# Altium PCB D3R900.PcbDoc
Units mil, origin at the board's own origin, x right, y up, seen from the top; angles counter-clockwise.
Board outline 3562.99 x 3346.46 mil, 2 copper layers (Top Layer, Bottom Layer); 68 components, 50 nets, 348 pads, 49 vias.
Unrouted connection lines stored in the file: 92.
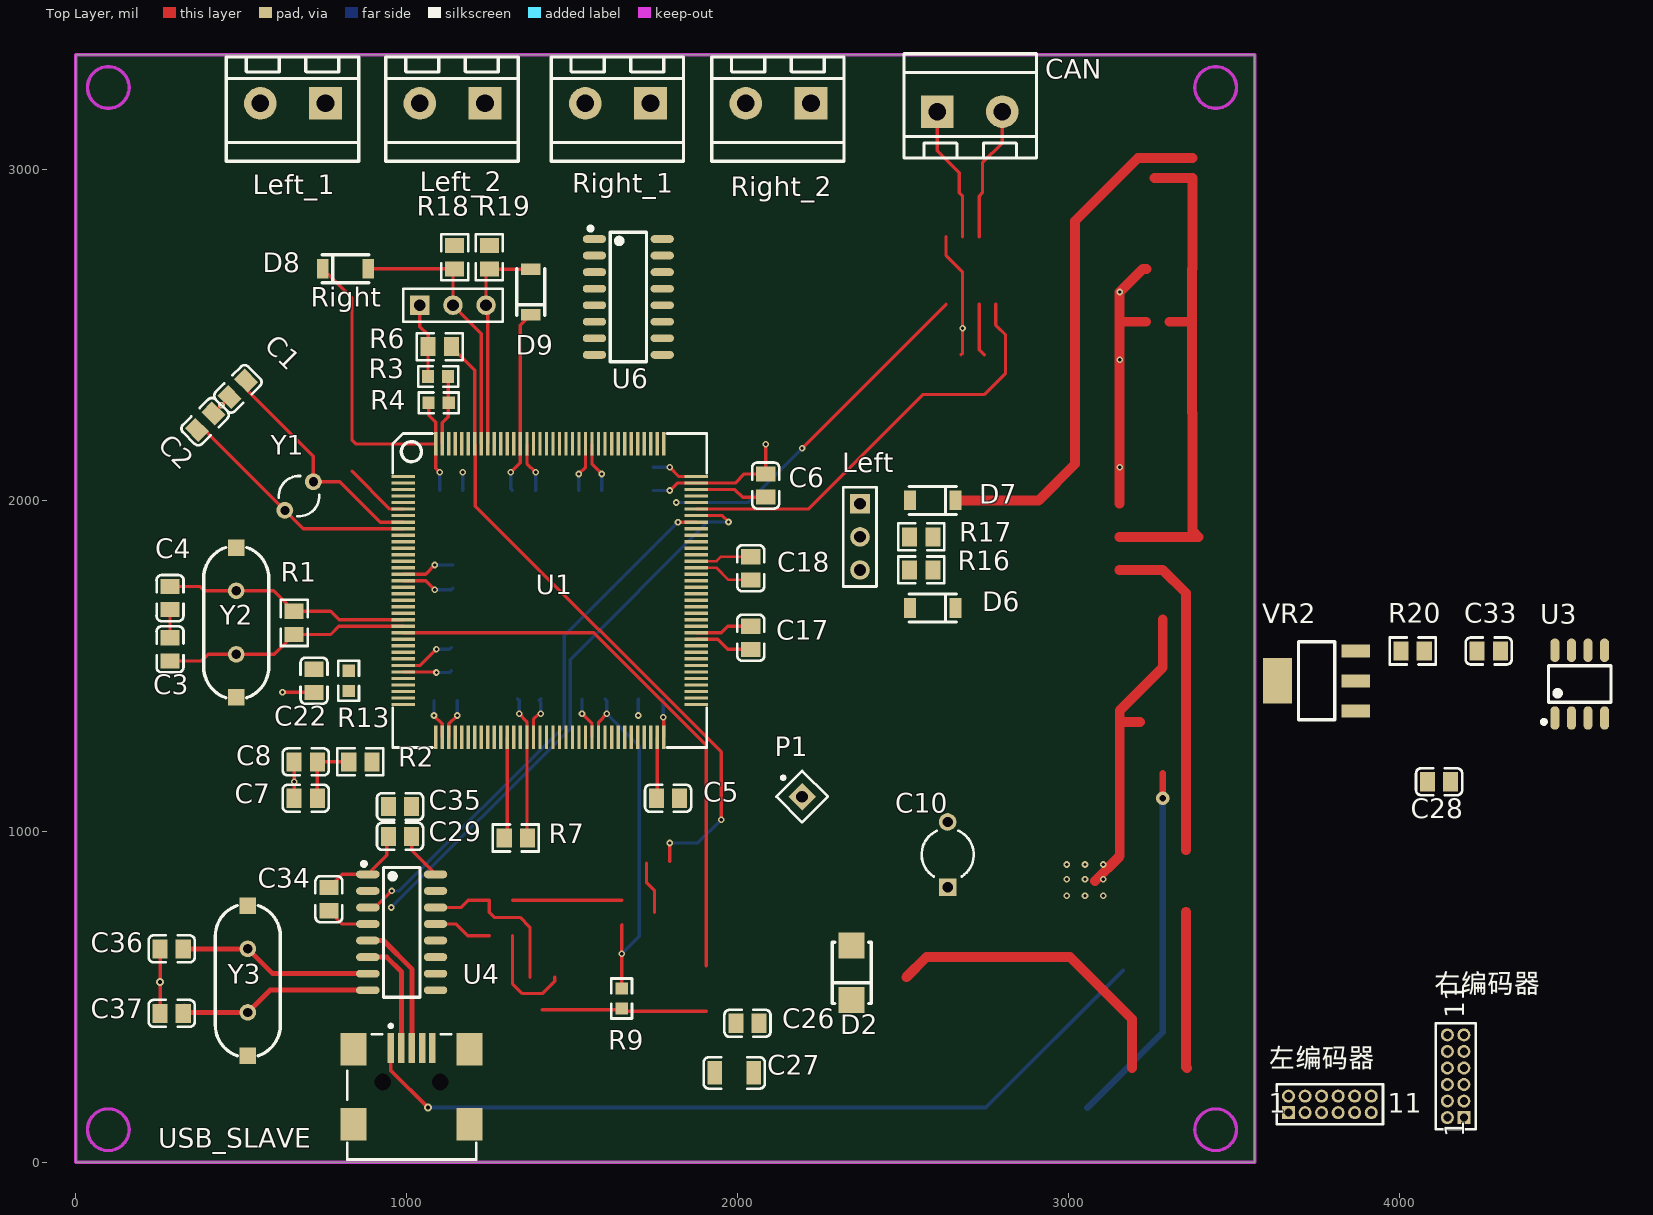
[diagram p0: Top Layer view]
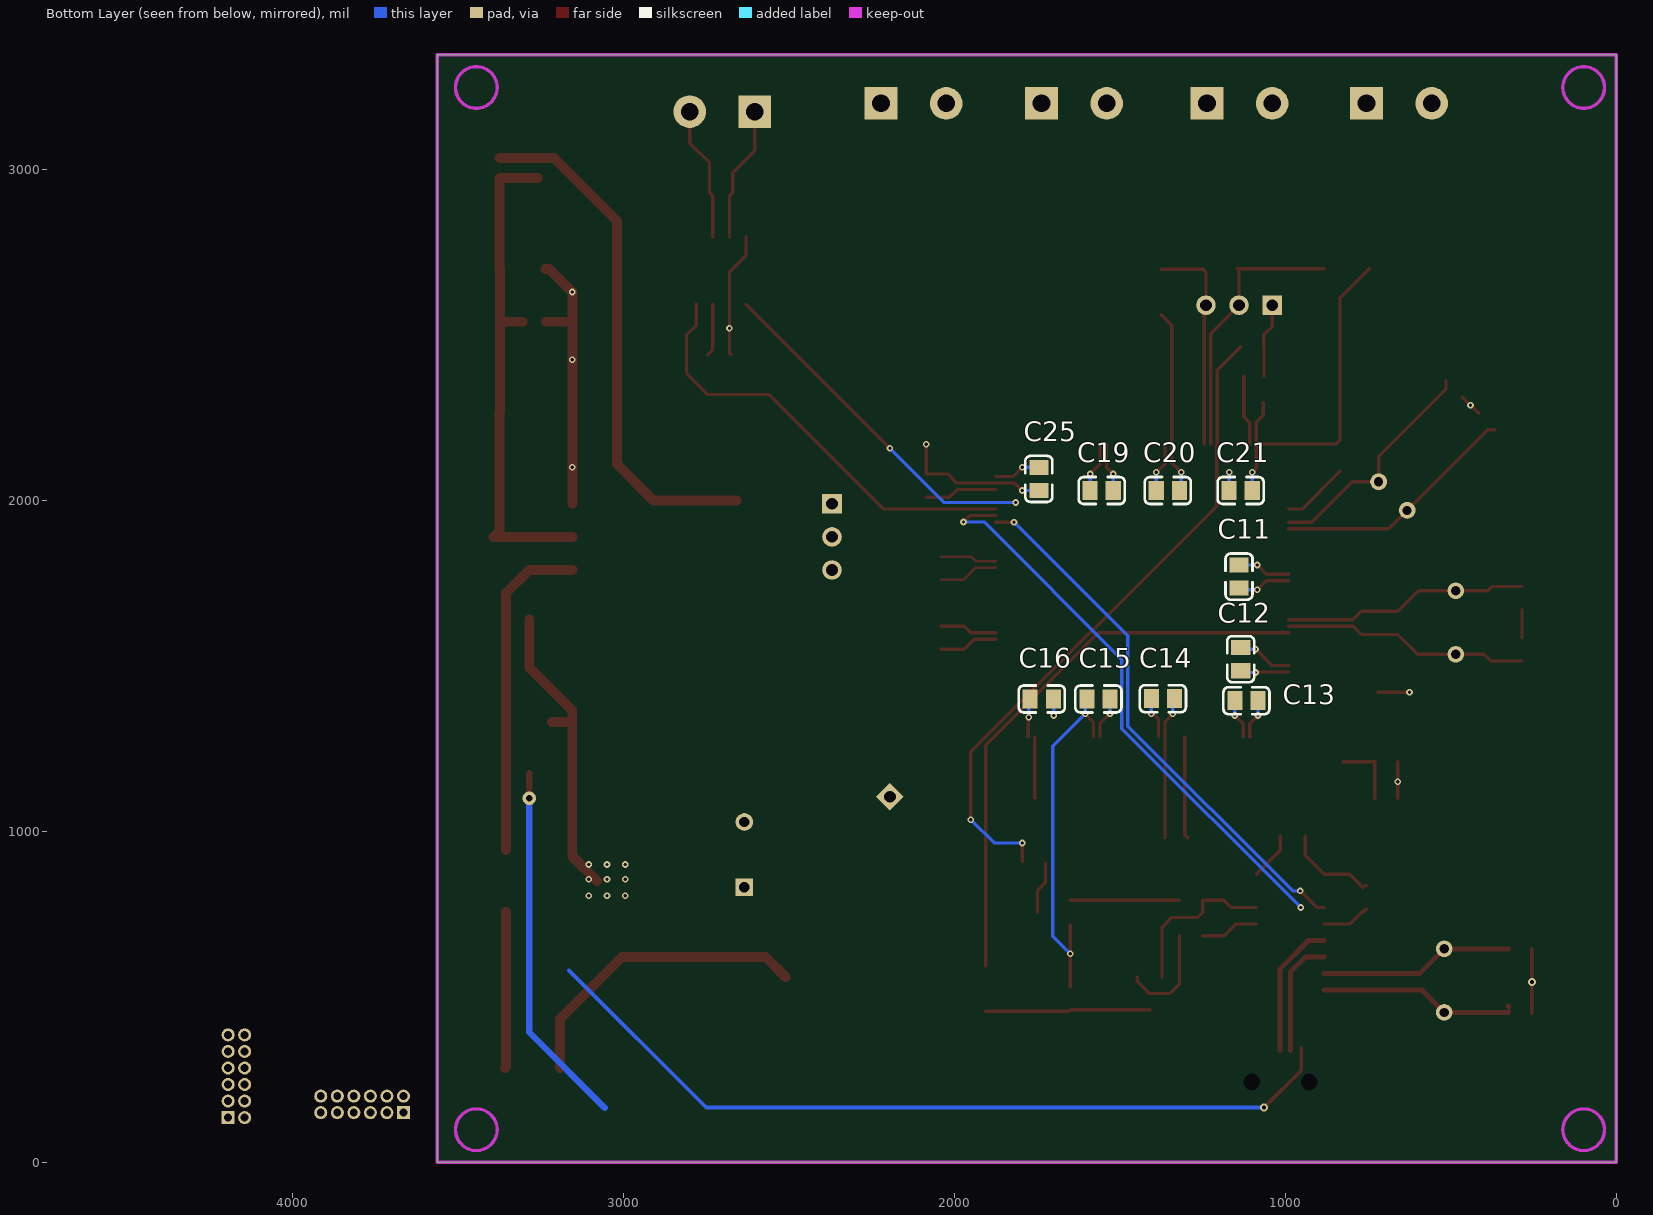
[diagram p1: Bottom Layer view, seen from below]

## Layer stack, top to bottom
Top Solder: solder mask 0.4, Solder Resist, Dk 3.5
Top Layer: signal copper 1.4
Dielectric 1: dielectric 12.6, FR-4, Dk 4.8
Bottom Layer: signal copper 1.4
Bottom Solder: solder mask 0.4, Solder Resist, Dk 3.5

## Board outline
0,0 0,3346.46 3562.99,3346.46 3562.99,0

## Design rules (kind name [scope] priority, off if disabled: settings)
Clearance [All] p1: gap=8 ignorepadtopadclearanceinfootprint=TRUE
PolygonConnect [All] p1: connectstyle=Relief reliefconductorwidth=10 reliefentries=4 polygonreliefangle="90 Angle" airgapwidth=10
RoutingVias [All] p1: holewidth=28 width=50 viastyle="Through Hole" minholewidth=28 minwidth=50 maxholewidth=28 maxwidth=50
SolderMaskExpansion [All] p1: expansion=4
Width [All] p1: maxlimit=30 minlimit=8 preferedwidth=10
30 further rules are at their usual default settings.

## Components (designator, comment, footprint, x,y, rotation, side; value= is the part's Value field where it differs from the comment)
C1 "1.0pF (010) 0.25pF 50V" LC-0805_C 490,2337.07 r45 top
C2 "1.0pF (010) 0.25pF 50V" LC-0805_C 391.01,2238.08 r225 top
C3 "22pF (220) 5% 50V" LC-0805_C 285,1550 r270 top
C4 "22pF (220) 5% 50V" LC-0805_C 285,1705 r90 top
C5 "2.2uF (225) 20% 50V" LC-0805_C 1790,1100 r0 top
C6 "2.2uF (225) 20% 50V" LC-0805_C 2085,2045 r90 top
C7 "10uF (106) 10% 25V" LC-0805_C 695,1100 r0 top
C8 "100nF(104) 10% 50V" LC-0805_C 695.04,1210 r0 top
C10 "Cap2" CAPR5-4X5 2635,930 r90 top value=1000uf
C11 "100nF(104) 10% 50V" LC-0805_C 1140,1770 r90 bottom
C12 "100nF(104) 10% 50V" LC-0805_C 1135,1520.43 r270 bottom
C13 "100nF(104) 10% 50V" LC-0805_C 1117.6,1395 r180 bottom
C14 "100nF(104) 10% 50V" LC-0805_C 1370,1401.1 r180 bottom
C15 "100nF(104) 10% 50V" LC-0805_C 1564.96,1400 r180 bottom
C16 "100nF(104) 10% 50V" LC-0805_C 1736.06,1400 r180 bottom
C17 "100nF(104) 10% 50V" LC-0805_C 2040,1585 r270 top
C18 "100nF(104) 10% 50V" LC-0805_C 2040,1795 r270 top
C19 "100nF(104) 10% 50V" LC-0805_C 1555,2030 r0 bottom
C20 "100nF(104) 10% 50V" LC-0805_C 1355,2030 r0 bottom
C21 "100nF(104) 10% 50V" LC-0805_C 1135,2030 r0 bottom
C22 "2.2uF (225) 20% 50V" LC-0805_C 720,1455.04 r90 top
C25 "100nF(104) 10% 50V" LC-0805_C 1745,2065 r270 bottom
C26 "100nF(104) 10% 50V" LC-0805_C 2030,420 r0 top
C27 "470nF (474) 10% 50V" LC-1206_C 1990,270 r0 top
C28 "100nF(104) 10% 50V" LC-0805_C 4120,1150 r0 top
C29 "10uF (106) 10% 25V" LC-0805_C 980,985 r180 top
C33 "100nF(104) 10% 50V" LC-0805_C 4270,1545 r0 top
C34 "100nF(104) 10% 50V" LC-0805_C 765,795 r90 top
C35 "100nF(104) 10% 50V" LC-0805_C 980,1075 r180 top
C36 "22pF (220) 5% 50V" LC-0805_C 290,645 r0 top
C37 "22pF (220) 5% 50V" LC-0805_C 290,450 r0 top
CAN "CAN" HEAD2L-0.8 2603.15,3175 r0 top
D2 "SS210" LC-SMA(DO-214AC)_S1 2345,572.52 r90 top
D6 "ZMM3V3" LC-LL-34 2590,1675 r180 top
D7 "ZMM3V3" LC-LL-34 2590,2000 r180 top
D8 "ZMM3V3" LC-LL-34 815,2700 r0 top
D9 "ZMM3V3" LC-LL-34 1375,2630 r90 top
Left "Header 3" HDR1X3 2370,1990 r270 top
Left_1 "En" HEAD2L-0.8 754.85,3200 r180 top
Left_2 "En" HEAD2L-0.8 1236.85,3200 r180 top
P1 "Plug" PIN1 2195,1105 r45 top
R1 "1MΩ (1004) ±1%" LC-0805_R 660,1630 r90 top
R2 "10Ω (10R0) ±1%" LC-0805_R 860,1210 r0 top
R3 "0Ω (0R0) ±1%" LC-0603_R 1095,2375 r180 top
R4 "0Ω (0R0) ±1%" LC-0603_R 1096.85,2295 r180 top
R6 "10KΩ (1002) ±1%" LC-0805_R 1100,2465 r180 top
R7 "10KΩ (1002) ±1%" LC-0805_R 1329.96,980 r180 top
R9 "0Ω (0R0) ±1%" LC-0603_R 1650,495 r90 top
R13 "0Ω (0R0) ±1%" LC-0603_R 825,1455 r270 top
R16 "1KΩ (1001) ±1%" LC-0805_R 2555,1790 r180 top
R17 "1KΩ (1001) ±1%" LC-0805_R 2555,1890 r180 top
R18 "1KΩ (1001) ±1%" LC-0805_R 1145,2735 r270 top
R19 "1KΩ (1001) ±1%" LC-0805_R 1249.96,2735 r270 top
R20 "120Ω (1200) ±1%" LC-0805_R 4040,1545 r0 top
Right "Header 3" HDR1X3 1040,2590 r0 top
Right_1 "En" HEAD2L-0.8 1736.85,3200 r180 top
Right_2 "En" HEAD2L-0.8 2221.85,3200 r180 top
U1 "STM32F407ZET6" LQFP144 989.8,2072.38 r0 top locked
U3 "CAN/TJA1050T/CM" LC-SOIC-8_150mil 4545,1445 r0 top
U4 "CH340G" LC-SOIC-16_150mil 985,695 r270 top
U6 "AM26LV32ACDRG4" LC-SOIC-16_150mil 1670,2615 r270 top
USB_SLAVE "USB-B(Mini)" USB/SM0.8-6H5 1015,35.94 r270 top
VR2 "AMS1117-3.3" LC-SOT-223 3750,1455 r0 top
Y1 "32.768K" R38 675,2013.35 r315 top
Y2 "8MHz" XTAL_US 485,1535 r90 top
Y3 "12MHz" XTAL_US 520,645 r270 top
右编码器 "MHDR2X6" MHDR2X6 4195,135 r90 top
左编码器 "MHDR2X6" MHDR2X6 3665,150 r0 top

## Footprints (in the part's own frame and the unit in brackets; to place one, negate y for a bottom-side part, rotate by r counter-clockwise, add the part's x,y. Pads: shape width x height; smd on the part's side, far side on the other; paste and mask are expansions set on the pad)
CAPR5-4X5 [mm] "Capacitor; 2 Leads"
  rect 1.35x1.35 hole 0.8: 1(-2.5,0)
  round 1.35 hole 0.8: 2(2.5,0)
  silkscreen extent -1.69,-2 1.82,2
HDR1X3 [mm] "Connector; Header; 3 Position"
  rect 1.5x1.5 hole 0.9: 1(0,0)
  round 1.5 hole 0.9: 2(2.54,0) 3(5.08,0)
  silkscreen extent -1.27,-1.27 6.35,1.27
HEAD2L-0.8 [mm]
  rect 2.5x2.5 hole 1.35: 1(0,0)
  round 2.5 hole 1.35: 2(5,0)
  silkscreen extent -2.54,-3.56 7.62,4.44
LC-0603_R [mm]
  rect 0.93x0.98 smd: 1(-0.77,0) 2(0.77,0)
  silkscreen extent -1.54,-0.79 1.54,0.79, body extent -0.85,-0.4 0.85,0.4, height 0.56
LC-0805_C [mm]
  rect 1.16x1.47 smd: 1(-0.89,0) 2(0.89,0)
  silkscreen extent -1.77,-1.04 1.77,1.04, body extent -1,-0.62 1,0.63, height 0.77
LC-0805_R [mm]
  rect 1.16x1.47 smd: 1(-0.89,0) 2(0.89,0)
  silkscreen extent -1.77,-1.03 1.77,1.03, body extent -1,-0.62 1,0.63, height 0.49
LC-1206_C [mm]
  rect 1.13x1.8 smd: 1(-1.49,0) 2(1.49,0)
  silkscreen extent -2.36,-1.2 2.35,1.2, body extent -1.6,-0.81 1.6,0.79, height 1
LC-LL-34 [mm]
  rect 0.9x1.5 smd: 1(1.75,0) 2(-1.75,0)
  silkscreen extent -1.8,-1.07 1.8,1.07
LC-SMA(DO-214AC)_S1 [mm]
  rect 2x2 smd: 1(2.1,0) 2(-2.1,0)
  silkscreen extent -2.35,-1.5 2.35,1.5
LC-SOIC-8_150mil [mm]
  oval 0.7x1.8 smd: 1(-1.905,-2.6) 2(-0.635,-2.6) 3(0.635,-2.6) 4(1.905,-2.6) 5(1.905,2.6) 6(0.635,2.6) 7(-0.635,2.6) 8(-1.905,2.6)
  silkscreen extent -2.9,-3.05 2.4,1.4
LC-SOIC-16_150mil [mm]
  oval 0.6x1.8 smd: 1(-4.445,-2.6) 2(-3.175,-2.6) 3(-1.905,-2.6) 4(-0.635,-2.6) 5(0.635,-2.6) 6(1.905,-2.6) 7(3.175,-2.6) 8(4.445,-2.6) 9(4.445,2.6) 10(3.175,2.6) 11(1.905,2.6) 12(0.635,2.6) 13(-0.635,2.6) 14(-1.905,2.6) 15(-3.175,2.6) 16(-4.445,2.6)
  silkscreen extent -5.4,-3.05 4.97,1.4
LC-SOT-223 [mm]
  rect 2.2x1 smd: 1(3,-2.3) 2(3,0) 3(3,2.3)
  rect 2.2x3.5 smd: 2(-3,0)
  silkscreen extent -1.4,-3 1.4,3, body extent -3.49,-3.24 3.49,3.24, height 1.64
LQFP144 [mil]
  rect 70.87x10 smd: 1(-0.35,0.02) 2(-0.35,-19.66) 3(-0.35,-39.35) 4(-0.35,-59.03) 5(-0.35,-78.72) 6(-0.35,-98.4) 7(-0.35,-118.09) 8(-0.35,-137.77) 9(-0.35,-157.46) 10(-0.35,-177.14) 11(-0.35,-196.83) 12(-0.35,-216.51) 13(-0.35,-236.2) 14(-0.35,-255.88) 15(-0.35,-275.57) 16(-0.35,-295.25) 17(-0.35,-314.94) 18(-0.35,-334.62) 19(-0.35,-354.31) 20(-0.35,-373.99) 21(-0.35,-393.68) 22(-0.35,-413.36) 23(-0.35,-433.05) 24(-0.35,-452.73) 25(-0.35,-472.42) 26(-0.35,-492.1) 27(-0.35,-511.79) 28(-0.35,-531.47) 29(-0.35,-551.16) 30(-0.35,-570.84) 31(-0.35,-590.53) 32(-0.35,-610.21) 33(-0.35,-629.9) 34(-0.35,-649.58) 35(-0.35,-669.27) 36(-0.35,-688.95) 73(885.47,-688.95) 74(885.47,-669.27) 75(885.47,-649.58) 76(885.47,-629.9) 77(885.47,-610.21) 78(885.47,-590.53) 79(885.47,-570.84) 80(885.47,-551.16) 81(885.47,-531.47) 82(885.47,-511.79) 83(885.47,-492.1) 84(885.47,-472.42) 85(885.47,-452.73) 86(885.47,-433.05) 87(885.47,-413.36) 88(885.47,-393.68) 89(885.47,-373.99) 90(885.47,-354.31) 91(885.47,-334.62) 92(885.47,-314.94) 93(885.47,-295.25) 94(885.47,-275.57) 95(885.47,-255.88) 96(885.47,-236.2) 97(885.47,-216.51) 98(885.47,-196.83) 99(885.47,-177.14) 100(885.47,-157.46) 101(885.47,-137.77) 102(885.47,-118.09) 103(885.47,-98.4) 104(885.47,-78.72) 105(885.47,-59.03) 106(885.47,-39.35) 107(885.47,-19.66) 108(885.47,0.02)
  rect 10x70.87 smd: 37(98.07,-787.38) 38(117.76,-787.38) 39(137.44,-787.38) 40(157.13,-787.38) 41(176.81,-787.38) 42(196.5,-787.38) 43(216.18,-787.38) 44(235.87,-787.38) 45(255.55,-787.38) 46(275.24,-787.38) 47(294.92,-787.38) 48(314.61,-787.38) 49(334.29,-787.38) 50(353.98,-787.38) 51(373.66,-787.38) 52(393.35,-787.38) 53(413.03,-787.38) 54(432.72,-787.38) 55(452.4,-787.38) 56(472.09,-787.38) 57(491.77,-787.38) 58(511.46,-787.38) 59(531.14,-787.38) 60(550.83,-787.38) 61(570.51,-787.38) 62(590.2,-787.38) 63(609.88,-787.38) 64(629.57,-787.38) 65(649.25,-787.38) 66(668.94,-787.38) 67(688.62,-787.38) 68(708.31,-787.38) 69(727.99,-787.38) 70(747.68,-787.38) 71(767.36,-787.38) 72(787.05,-787.38) 109(787.05,98.45) 110(767.36,98.45) 111(747.68,98.45) 112(727.99,98.45) 113(708.31,98.45) 114(688.62,98.45) 115(668.94,98.45) 116(649.25,98.45) 117(629.57,98.45) 118(609.88,98.45) 119(590.2,98.45) 120(570.51,98.45) 121(550.83,98.45) 122(531.14,98.45) 123(511.46,98.45) 124(491.77,98.45) 125(472.09,98.45) 126(452.4,98.45) 127(432.72,98.45) 128(413.03,98.45) 129(393.35,98.45) 130(373.66,98.45) 131(353.98,98.45) 132(334.29,98.45) 133(314.61,98.45) 134(294.92,98.45) 135(275.24,98.45) 136(255.55,98.45) 137(235.87,98.45) 138(216.18,98.45) 139(196.5,98.45) 140(176.81,98.45) 141(157.13,98.45) 142(137.44,98.45) 143(117.76,98.45) 144(98.07,98.45)
  silkscreen extent -32,-819 917,130
MHDR2X6 [mm] "Connector; Header; 6x2 Position"
  rect 1x1 hole 0.6: 1(0,0)
  round 1 hole 0.6: 2(0,1.27) 3(1.27,0) 4(1.27,1.27) 5(2.54,0) 6(2.54,1.27) 7(3.81,0) 8(3.81,1.27) 9(5.08,0) 10(5.08,1.27) 11(6.35,0) 12(6.35,1.27)
  silkscreen extent -0.9,-0.9 7.25,2.17
PIN1 [mm] "Connector; Plug"
  rect 1.5x1.5 hole 0.9: 1(0,0)
  silkscreen extent -1.4,-1.4 1.4,2.17
R38 [mm] "Crystal, Thru-Hole; 2 Leads; Body 3.1 x 8.2 mm (Dia.xH)"
  round 1.3 hole 0.7: 1(0,1.55) 2(0,-1.55)
  silkscreen extent -1.55,-1.19 1.55,1.17
USB/SM0.8-6H5 [mm]
  rect 2.3x0.5 smd: 1(-7.85,-1.6) 2(-7.85,-0.8) 3(-7.85,0) 4(-7.85,0.8) 5(-7.85,1.6)
  rect 2.5x2 smd: 6(-7.75,4.45) 7(-1.996,4.45) 8(-7.75,-4.45) 9(-1.996,-4.45)
  round 0.6 hole 1.27 unplated: MH1(-5.25,2.2) MH2(-5.25,-2.2)
  silkscreen extent -9.67,-4.95 0.7,4.95
XTAL_US [mil]
  round 50 hole 28: 1(0,0) 2(192.13,0)
  rect 50x50 smd: ""(-130.32,0) ""(322.44,0)
  silkscreen extent -131,-98 323,98

## Part data
C1 C2: library part "0805 1.0pF (010) 0.25pF 50V", "贴片电容", Package=0805, SuppliersPartNumber=C14971, ComponentLink1Description=供应商, ComponentLink1URL=http://www.szlcsc.com/product/details_15644.html, Supplier=LC
C3 C4 C36 C37: library part "0805 22pF (220) 5% 50V", "贴片电容", Package=0805, SuppliersPartNumber=C1804, ComponentLink1Description=供应商, ComponentLink1URL=http://www.szlcsc.com/product/details_2156.html, Supplier=LC
C5 C6 C22: library part "0805 2.2uF (225) 20% 50V", "贴片电容", Package=0805, SuppliersPartNumber=C49217, ComponentLink1Description=供应商, ComponentLink1URL=http://www.szlcsc.com/product/details_50225.html, Supplier=LC
C7 C29: library part "0805 10uF (106) 10% 25V", "贴片电容", Package=0805, SuppliersPartNumber=C15850, ComponentLink1Description=供应商, ComponentLink1URL=http://www.szlcsc.com/product/details_16532.html, Supplier=LC
C8 C11 C12 C13 C14 C15 C16 C17 C18 C19 C20 C21 C25 C26 C28 C33 C34 C35: library part "0805 100nF(104) 10% 50V", "贴片电容", Package=0805, SuppliersPartNumber=C49678, ComponentLink1Description=供应商, ComponentLink1URL=http://www.szlcsc.com/product/details_50686.html, Supplier=LC
C10: "Capacitor", PackageDescription="Capacitor; 2 Leads", PackageReference=CAPR5-4X5, Published=23-Sep-2002, Publisher="Altium Limited"
C27: library part "1206 470nF (474) 10% 50V", "贴片电容", Package=1206, SuppliersPartNumber=C1871, ComponentLink1Description=供应商, ComponentLink1URL=http://www.szlcsc.com/product/details_2223.html, Supplier=LC
CAN Left_1 Left_2 Right_1 Right_2: library part HEAD2
D2: library part "SMA(DO-214AC) SS210", "二极管", Package=SMA(DO-214AC), SuppliersPartNumber=C14996, ComponentLink1Description=供应商, ComponentLink1URL=http://www.szlcsc.com/product/details_15669.html, Supplier=LC
D6 D7 D8 D9: library part "LL-34 ZMM3V3", "稳压二极管", Package=LL-34, SuppliersPartNumber=C8056, ComponentLink1Description=供应商, ComponentLink1URL=http://www.szlcsc.com/product/details_8535.html, Supplier=LC
Left Right: "Header, 3-Pin", LatestRevisionDate=17-Jul-2002, LatestRevisionNote="Re-released for DXP Platform.", Publisher="Altium Limited"
R1: library part "0805 1MΩ (1004) 1%", "贴片电阻", Package=0805, SuppliersPartNumber=C17514, ComponentLink1Description=供应商, ComponentLink1URL=http://www.szlcsc.com/product/details_18202.html, Supplier=LC
R2: library part "0805 10Ω (10R0) 1%", "贴片电阻", Package=0805, SuppliersPartNumber=C17415, ComponentLink1Description=供应商, ComponentLink1URL=http://www.szlcsc.com/product/details_18103.html, Supplier=LC
R3 R4 R9 R13: library part "0603 0Ω (0R0) 1%", "贴片电阻", Package=0603, SuppliersPartNumber=C21189, ComponentLink1Description=供应商, ComponentLink1URL=http://www.szlcsc.com/product/details_21903.html, Supplier=LC
R6 R7: library part "0805 10KΩ (1002) 1%", "贴片电阻", Package=0805, SuppliersPartNumber=C17414, ComponentLink1Description=供应商, ComponentLink1URL=http://www.szlcsc.com/product/details_18102.html, Supplier=LC
R16 R17 R18 R19: library part "0805 1KΩ (1001) 1%", "贴片电阻", Package=0805, SuppliersPartNumber=C17513, ComponentLink1Description=供应商, ComponentLink1URL=http://www.szlcsc.com/product/details_18201.html, Supplier=LC
R20: library part "0805 120Ω (1200) 1%", "贴片电阻", Package=0805, SuppliersPartNumber=C17437, ComponentLink1Description=供应商, ComponentLink1URL=http://www.szlcsc.com/product/details_18125.html, Supplier=LC
U3: "CAN", Package=SOIC-8_150mil, SuppliersPartNumber=C6952, ComponentLink1Description=供应商, ComponentLink1URL=http://www.szlcsc.com/product/details_7424.html, Supplier=LC
U4: "USB", Package=SOIC-16_150mil, SuppliersPartNumber=C14267, ComponentLink1Description=供应商, ComponentLink1URL=http://www.szlcsc.com/product/details_14927.html, Supplier=LC
U6: library part AM26LS32ACDRG4, "接口芯片", Package=SOIC-16_150mil, SuppliersPartNumber=C6180, ComponentLink1Description=供应商, ComponentLink1URL=http://www.szlcsc.com/product/details_6646.html, Supplier=LC
USB_SLAVE: library part USB5
VR2: library part "SOT-223 AMS1117-3.3", "低压差线性稳压(LDO)", Package=SOT-223, SuppliersPartNumber=C6186, ComponentLink1Description=供应商, ComponentLink1URL=http://www.szlcsc.com/product/details_6652.html, Supplier=LC
Y1 Y2 Y3: library part XTAL, "Crystal Oscillator", LatestRevisionDate=17-Jul-2002, LatestRevisionNote="Re-released for DXP Platform.", Published=8-Jun-2000, Publisher="Altium Limited"
  Y1: PackageDescription="Crystal, Thru-Hole; 2 Leads; Body 3.1 x 8.2 mm (Dia.xH)", PackageReference=R38
右编码器 左编码器: "Header, 6-Pin, Dual row", LatestRevisionDate=17-Jul-2002, LatestRevisionNote="Re-released for DXP Platform.", Publisher="Altium Limited"
P1: LatestRevisionDate=17-Jul-2002, LatestRevisionNote="Re-released for DXP Platform.", Publisher="Altium Limited"

## Via types
v1: diameter 20, hole 10, Top Layer to Bottom Layer, 46 vias
v2: diameter 24, hole 12, Top Layer to Bottom Layer, 2 vias
v3: diameter 40, hole 20, Top Layer to Bottom Layer, 1 vias

## Nets (pads, with @x,y where several pads share a name; then routed paths per layer and width w, separated by ;. In a path a pad name is that pad's centre, name@x,y a point inside that pad or via, vN(x,y) a via of type N, cw(c..) or ccw(c..) an arc to the next point about the centre after c; other vN are vias at no path point)
+3.3: C27.2 C28.2 C34.1 R9.1 U4.4 VR2.2 | length 641.7
  Top Layer w10: C34.1@755,764.96 C34.1@762.5,757.46 ; C34.1 804.96,720 U4.4 ; 1410,460.79 1649.17,460.79 1653.86,456.1 1905,456.1
+5: C10.1 C26.2 C29.1 C33.1 C35.1 D2.2 U3.3 U4.16 U6.4 U6.12 U6.16 VR2.3 | length 145
  Top Layer w10: C29.1 1015.04,942.32 U4.16
A+: Left_1.1 U6.2
A-: Left_1.2 U6.1
AO: R16.1 U6.3
B+: Left_2.1 U6.6
B-: Left_2.2 U6.7
BO: R17.1 U6.5
BOOT0: R6.1 U1.138 | length 2007
  Top Layer w10: R6.1 1205.99,2394.05 U1.138 1207.67,2169.14 1207.67,1982.79 1950.35,1240.1 v1(1950.35,1035) ; 1795.04,910 v1(1795.04,965)
  Bottom Layer w10: v1(1795.04,965) 1880.35,965 v1(1950.35,1035)
BOOT1: R7.2 U1.48 | length 308.9
  Top Layer w10: R7.2 1304.41,989.49 U1.48
C+: Right_1.1 U6.14
C-: Right_1.2 U6.15
CAN_RX: U1.103 U3.4 | length 1325
  Top Layer w10: U1.103 2213.98,1973.98 2560,2320 2745,2320 2810,2385 2810,2500 2780,2530 2780,2592.64
CAN_TX: U1.104 U3.1
CO: R18.1 U6.13
D+: Right_2.1 U6.10
D-: Right_2.2 U6.9
DO: R19.1 U6.11
GND: C1.1 C2.1 C5.2 C6.2 C7.1 C8.1 C10.2 C11.2 C12.2 C13.2 C14.2 C15.2 C16.2 C17.2 C18.2 C19.2 C20.2 C21.2 C22.1 C25.2 C26.1 C27.1 C28.1 C29.2 C33.2 C34.2 C35.2 C36.1 C37.1 Left.1 P1.1 R3.2 R6.2 R7.1 Right.1 U1.16 U1.31 U1.38 U1.51 U1.61 U1.83 U1.94 U1.107 U1.120 U1.130 U3.2 U3.8 U4.1 U6.8 USB_SLAVE.5 VR2.1 | length 3182.4
  Top Layer w8: U1.94 1935.63,1796.81 1972.48,1759.96 C18.2
  Top Layer w10: C37.1 C36.1 ; C2.1 C1.1 ; v1(625,1420) C22.1 ; C7.1 C8.1 C8.1 ; C34.2@755,835.04 C34.2@757.5,837.54 ; C34.2 804.96,870 U4.1 939.96,927.32 C29.2@939.96,985 ; U1.31 1088.15,1481.85 v1(1090,1480) ; U1.16 1057.09,1777.13 v1(1085,1805.04) ; Right.1 1040,2525 1064.96,2500.04 R6.2 1064.68,2464.72 R3.2 ; v1(1082.56,1350) 1107.56,1325 U1.38 ; v1(1340,1355) 1363.47,1331.53 U1.51 1363.47,981.53 R7.1 ; U1.130 1363.47,2111.53 v1(1390,2085) ; v1(1530,1355) 1560.32,1324.68 U1.61 ; U1.120 1560.32,2109.68 v1(1590,2080) ; v1(1795,2030) 1817.72,2052.72 U1.107 1992.76,2052.72 2020.08,2080.04 C6.2 v1(2085,2170) ; U1.83 1939.72,1580.28 1970.04,1549.96 C17.2
  Bottom Layer w10: v1(1082.56,1350) C13.2 ; v1(1085,1805.04) C11.2 ; v1(1090,1480) 1129.61,1480 C12.2 ; v1(1170,2085) C21.2 C21.2 ; C14.2 1340,1396.06 v1(1340,1355) ; v1(1390,2085) C20.2 C20.2 ; C15.2 1530,1399.92 v1(1530,1355) ; v1(1590,2080) C19.2 C19.2 ; v1(1700,1350) 1700,1398.98 C16.2 ; C25.2 C25.2 v1(1795,2030)
  other v1: 660,1150 440.5,2287.57
  other v2: 254.96,545
Left_1: D6.1 Left.3 R16.2 U1.96
Left_2: D7.1 Left.2 R17.2 U1.97
NetC1_2: C1.2 U1.8 Y1.1 | length 711.4
  Top Layer w10: C1.2 514.78,2336.63 718.15,2133.25 Y1.1 798.5,2056.5 920.39,1934.61 U1.8
NetC2_2: C2.2 U1.9 Y1.2 | length 746.8
  Top Layer w10: C2.2 388.75,2213.3 Y1.2 687.13,1914.92 U1.9
NetC3_1: C3.1 C4.1 | length 84.9
  Top Layer w10: C3.1 C4.1
NetC3_2: C3.2 R1.1 U1.24 Y2.1 | length 747.8
  Top Layer w10: C3.2 379.92,1514.96 399.96,1535 Y2.1 600.04,1535 R1.1 769.96,1594.96 794.65,1619.65 U1.24
NetC4_2: C4.2 R1.2 U1.23 Y2.2 | length 746.2
  Top Layer w10: C4.2 374.96,1740.04 387.87,1727.13 Y2.2 597.91,1727.13 R1.2 770,1665.04 795.71,1639.33 U1.23
NetC5_1: C5.1 U1.71 | length 185.9
  Top Layer w10: C5.1 1757.17,1102.21 U1.71
NetC6_1: C6.1 U1.106 | length 219.3
  Top Layer w10: U1.106 1991.97,2033.03 2015.04,2009.96 C6.1
NetC36_2: C36.2 U4.7 Y3.1 | length 592.2
  Top Layer w15: C36.2 Y3.1 595,570 U4.7 ; Y3.1@520,650 Y3.1@522.5,647.5
NetC37_2: C37.2 U4.8 Y3.2 | length 590.3
  Top Layer w15: C37.2@325.04,455 327.17,452.87 Y3.2 587.13,520 U4.8 ; C37.2@325.04,470 C37.2@327.91,472.87
NetCAN_1: CAN.1 R20.2 U3.7 | length 409.5
  Top Layer w10: CAN.1 2603.15,3056.85 2670,2990 2670,2930 2680,2920 2680,2797.36
NetCAN_2: CAN.2 R20.1 U3.6 | length 406.6
  Top Layer w10: 2730,2797.36 2730,2919.92 2740.08,2930 2740.08,3020.08 2800,3080 CAN.2
NetR3_1: R3.1 R4.1 U1.143 | length 333.5
  Top Layer w10: U1.143 1107.56,2235.31 1125.31,2253.07 ; 1125.31,2253.07 R3.1 1125.31,2253.07
NetU4_5: U4.5 USB_SLAVE.3 | length 415.9
  Top Layer w15: U4.5 930,670 1016.61,583.39 USB_SLAVE.3@1016.61,337.36
NetU4_6: U4.6 USB_SLAVE.2 | length 358.7
  Top Layer w15: U4.6 940,620 985.12,574.88 USB_SLAVE.2@985.12,337.36
R1: U1.37
R2: U1.70
REMOTE_IN1: U1.100
REMOTE_IN2: U1.60
RESET: U1.25 | length 1722.5
  Top Layer w10: U1.25 1565.04,1599.96 1905,1260 1905,593.9
Right_1: D8.1 R18.2 Right.2 U1.137 | length 827.8
  Top Layer w10: D8.1 R18.2 R18.2 1140,2694.96 Right.2 1225.67,2504.33 U1.137
Right_2: D9.1 R19.2 Right.3 U1.136 | length 661
  Top Layer w10: U1.136 1245.36,2584.64 Right.3 1240,2690 R19.2 1251.02,2698.9 D9.1
T1: U1.36
T2: U1.69
U_RX: U1.102 U4.3 | length 1729.1
  Top Layer w10: U1.102 1953.35,1954.29 v1(1972.64,1935)
  Bottom Layer w10: v1(953.62,770) 1494.09,1310.47 1494.09,1519.09 1910,1935 v1(1972.64,1935)
U_TX: U1.101 U4.2 | length 1635.2
  Top Layer w10: 882.64,770 905,770 v1(955,820) ; v1@1820,1935 1820.39,1934.61 U1.101
  Bottom Layer w10: v1(955,820) 978.17,820 1476.09,1317.92 1476.09,1591.09 1819.61,1934.61 v1(1820,1934.61)
VBAT: C11.1 C12.1 C13.1 C14.1 C15.1 C16.1 C17.1 C18.1 C19.1 C20.1 C21.1 C25.1 D6.2 D7.2 D8.2 D9.2 R2.2 R4.2 R9.2 U1.6 U1.17 U1.30 U1.39 U1.52 U1.62 U1.72 U1.84 U1.95 U1.108 U1.121 U1.131 U1.144 | length 5866
  Top Layer w8: U1.95 1936.5,1816.5 1950.04,1830.04 C18.1
  Top Layer w10: D8.2 835,2611.1 835,2181.46 845.63,2170.83 U1.144 ; 835,2088.54 949.57,1973.98 U1.6 ; U1.30 1041.54,1501.54 v1(1090,1550) ; U1.17 1057.56,1757.44 v1(1085,1730) ; R4.2 1066.54,2258.15 1087.88,2236.81 U1.144 ; v1(1099.96,2085) 1087.88,2097.08 U1.144 ; U1.39 1127.25,1324.61 v1(1152.64,1350) ; v1(1315,2085) 1343.78,2113.78 U1.131 1343.78,2529.88 D9.2 ; U1.52 1383.15,1338.15 1400,1355 v1(1405,1355) ; v1(1520,2080) 1540.63,2100.63 U1.121 ; U1.62 1580,1330 v1(1605,1355) ; R9.2@1650,530.04 v1(1650,630) 1650,716.81 1650.79,717.6 ; v1(1775,1345) 1776.85,1343.15 U1.72 ; v1(1795,2100) 1822.6,2072.4 U1.108 ; U1.84 1950.35,1599.96 1970.43,1620.04 C17.1
  Top Layer w30: D7.2 2910,2000 3020,2110 3020,2845 3210.32,3035.32 3260,3035.32 3375,3035.32
  Bottom Layer w10: v1(1085,1730) 1135.04,1730 C11.1 ; v1(1090,1550) 1129.53,1550 C12.1 ; C21.1 v1(1099.96,2085) ; v1(1152.64,1350) C13.1 ; v1(1315,2085) 1315,2034.96 C20.1 ; v1(1405,1355) 1405,1391.06 1400,1396.06 C14.1 ; C19.1 C19.1 v1(1520,2080) ; C15.1 1605,1395 v1(1605,1355) 1702.72,1257.28 1702.72,682.72 v1(1650,630) ; C25.1 C25.1 v1(1795,2100) ; C16.1 1775,1396.1 v1(1775,1345)
VDDA: C7.2 C8.2 R2.1 R13.2 U1.33 | length 204.9
  Top Layer w10: C7.2 730.08,1100.04 C8.2 R2.1
VREF+: C22.2 R13.1 U1.32
VUSB: D2.1 USB_SLAVE.1 | length 2498.7
  Top Layer w12: USB_SLAVE.1 952.01,277.99 v2(1065,165)
  Bottom Layer w12: v2(1065,165) 2750,165 3165,580
pads on no net: U1.1 U1.2 U1.3 U1.4 U1.5 U1.7 U1.10 U1.11 U1.12 U1.13 U1.14 U1.15 U1.18 U1.19 U1.20 U1.21 U1.22 U1.26 U1.27 U1.28 U1.29 U1.34 U1.35 U1.40 U1.41 U1.42 U1.43 U1.44 U1.45 U1.46 U1.47 U1.49 U1.50 U1.53 U1.54 U1.55 U1.56 U1.57 U1.58 U1.59 U1.63 U1.64 U1.65 U1.66 U1.67 U1.68 U1.73 U1.74 U1.75 U1.76 U1.77 U1.78 U1.79 U1.80 U1.81 U1.82 U1.85 U1.86 U1.87 U1.88 U1.89 U1.90 U1.91 U1.92 U1.93 U1.98 U1.99 U1.105 U1.109 U1.110 U1.111 U1.112 U1.113 U1.114 U1.115 U1.116 U1.117 U1.118 U1.119 U1.122 U1.123 U1.124 U1.125 U1.126 U1.127 U1.128 U1.129 U1.132 U1.133 U1.134 U1.135 U1.139 U1.140 U1.141 U1.142 U3.5 U4.9 U4.10 U4.11 U4.12 U4.13 U4.14 U4.15 USB_SLAVE.4 USB_SLAVE.6 USB_SLAVE.7 USB_SLAVE.8 USB_SLAVE.9 USB_SLAVE.MH1 USB_SLAVE.MH2 Y2. Y3. 右编码器.1 右编码器.2 右编码器.3 右编码器.4 右编码器.5 右编码器.6 右编码器.7 右编码器.8 右编码器.9 右编码器.10 右编码器.11 右编码器.12 左编码器.1 左编码器.2 左编码器.3 左编码器.4 左编码器.5 左编码器.6 左编码器.7 左编码器.8 左编码器.9 左编码器.10 左编码器.11 左编码器.12
copper on no net: | length 10588.3
  Top Layer w10: 1087.36,720 1150,720 1185,685 1249.69,685 ; 1087.36,770 1165,770 1186.5,791.5 1249.96,791.5 1249.96,754.88 1264.84,740 1342.6,740 1372.6,710 1372.6,559.21 ; 1319.77,685 1319.77,540.23 1350,510 1410,510 1447.4,547.4 1447.4,559.21 ; 1320.04,791.5 1649.88,791.5 1650.79,792.4 ; 1725.04,903.46 1725.04,844.96 1749.21,820.79 1749.21,755 ; v1(2195,2157.64) 2630,2592.64 ; 2630,2797.36 2630,2740 2680,2690 2680,2592.64 v1(2680,2520) 2680,2445.04 2674.96,2440 ; 2730,2592.64 2730,2455.04 2745.04,2440
  Top Layer w20: v3(3284.96,1099.96) 3284.96,1175
  Top Layer w30: 2510,559.09 2570.91,620 3005,620 3192.32,432.68 3192.32,285 ; 3080,850 3155,925 3155,1340 ; 3153.43,1790 3285,1790 3355.04,1719.96 3355.04,1640 3355.43,1639.61 ; 3153.43,1890 3393.43,1890 3375,1908.43 3375,2265 3373.9,2266.1 3373.9,2545 ; 3153.43,1990 3154.76,1991.33 3154.76,2265 3154.76,2535 ; 3216.06,1330 3165,1330 3155,1340 ; 3234.96,2540 3159.76,2540 3154.76,2535 ; 3236.1,2700 3224.76,2700 v1(3154.76,2630) 3154.76,2535 ; 3260,2974.69 3375,2974.69 3375,2701.1 3373.9,2700 3373.9,2545 ; 3284.96,1640 3284.96,1495 3155,1365.04 3155,1340 ; 3305.04,2540 3368.9,2540 3373.9,2545 ; 3355.59,757.04 3355.04,756.49 3355.04,575 3355.04,287.64 3357.68,285 ; 3355.43,1639.61 3355.43,942.96 3355.43,1330 3355.43,1639.61
  Bottom Layer w10: v1(1815,1993.66) 2031.02,1993.66 v1(2195,2157.64)
  Bottom Layer w20: 3057.13,165 3284.96,392.83 v3(3284.96,1099.96)
  other v1: 2995,805 3050,805 3105,805 2995,855 3050,855 3105,855 2995,900 3050,900 3105,900 3154.76,2100 3154.76,2425

## Keep-outs
Keep-Out Layer:
  circle w10: c3444.88,98.43 r62.99
  circle w10: c98.43,98.43 r62.99
  circle w10: c98.43,3248.03 r62.99
  circle w10: c3444.88,3248.03 r62.99
  lines w10: 0,0 3562.99,0 3562.99,3346.46 0,3346.46 0,0

## Dimensions
3562.99,3346.46 to 0,3346.46 on Top Overlay
161.42,3248.03 to 3507.87,3248.03 on Top Overlay
35.43,98.43 to 161.42,98.43 on Top Overlay
161.42,3248.03 to 161.42,98.43 on Top Overlay
0,0 to 0,3346.46 on Top Overlay

## Text inside footprints (layer, text, board x,y; h text height)
右编码器: Top Overlay "11" at 4215,435 h100 r90; Top Overlay "1" at 4215,75 h100 r90
左编码器: Top Overlay "11" at 3965,130 h100; Top Overlay "1" at 3605,130 h100